# EAGLE board Prototype1 (EAGLE 6.1)
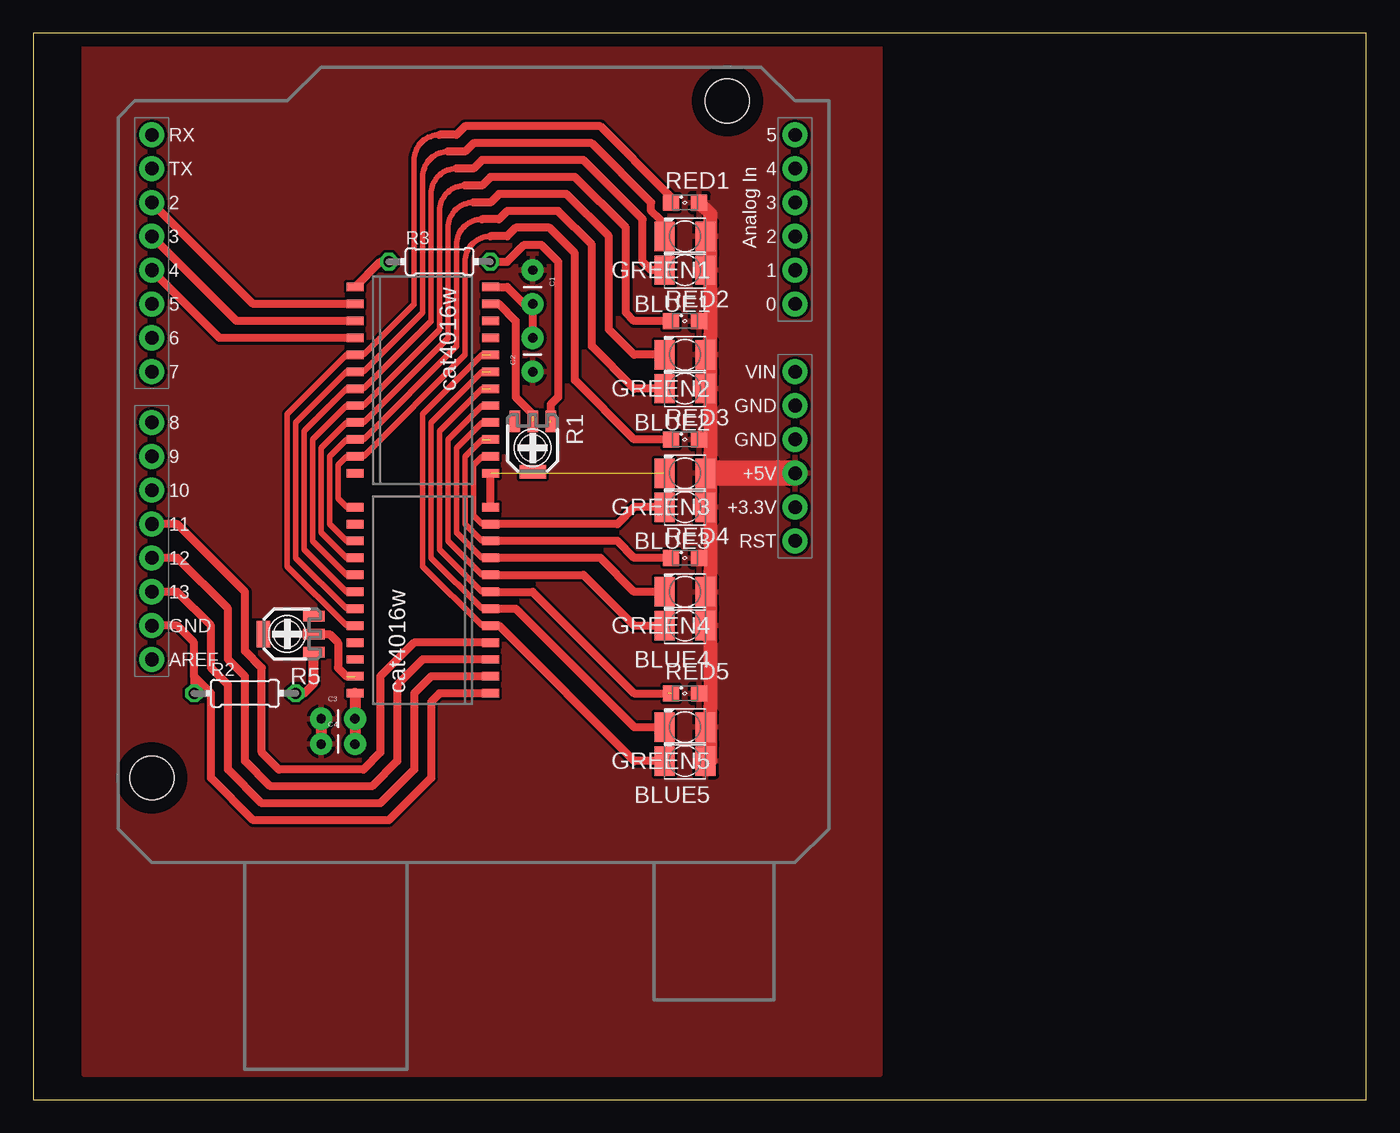
[diagram p0: board, top side]
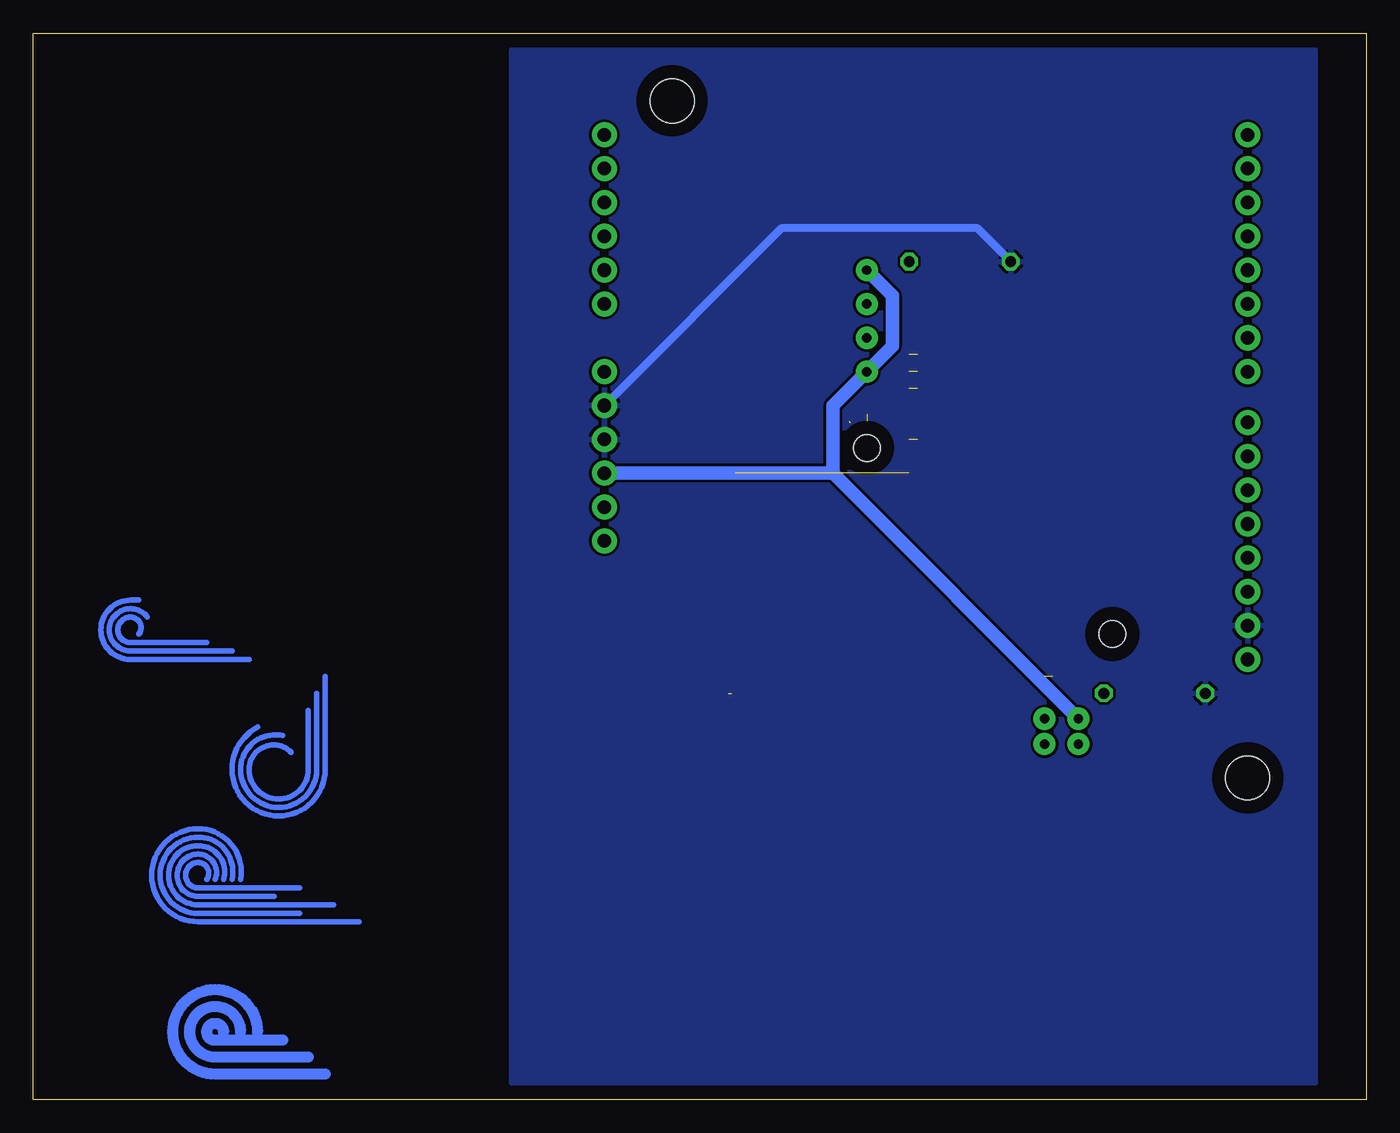
[diagram p1: board, bottom side, seen from below]

Size 100 x 80 mm. Coordinates in mm from the lower left corner, seen from the top.
Outline: 0,0 100,0 100,80 0,80 0,0
Copper layers (1*16): Top 0.035mm / dielectric 1.5mm / Bottom 0.035mm
Design rules: minimum track width 10mil, minimum drill 24mil, track to track 8mil, track to pad 8mil, pad to pad 8mil, via to via 8mil, smd to smd 8mil, copper to edge 40mil, drill to drill 8mil, minimum pad ring 10mil, minimum via ring 8mil, stop-mask expansion 4mil, vias tented up to drill 0mil, thermal gap 10mil

## Footprints (pad centres in the part's own frame; a part is rotated, then mirrored left to right if it is on the bottom)
KA-3528ASYC = smd 1.5 x 2.2: A -1.55,0; C 1.55,0
CAP-PTH-SMALL = drill 0.7 pad 1.651: 1 0,0; 2 2.54,0
RTRIM3165W = smd 0.8 x 1.6: 1 -1.35,-2; 2 0,-2; 3 1.35,-2 | smd 2 x 1: 4 0,1.8 | hole 2: 0,0
0204/7 = drill 0.813 octagon: 1 -3.81,0; 2 3.81,0
SML0805 = smd 1.2 x 1.2: A 1.05,0; C -1.05,0
DUEMILANOVE_SHIELD = drill 1.016 pad 1.88: 3.3V 50.8,26.67; 5V 50.8,29.21; A0 50.8,41.91; A1 50.8,44.45; A2 50.8,46.99; A3 50.8,49.53; A4 50.8,52.07; A5 50.8,54.61; AREF 2.54,15.24; D2 2.54,49.53; D3 2.54,46.99; D4 2.54,44.45; D5 2.54,41.91; D6 2.54,39.37; D7 2.54,36.83; D8 2.54,33.02; D9 2.54,30.48; D10 2.54,27.94; D11 2.54,25.4; D12 2.54,22.86; D13 2.54,20.32; GND@0 50.8,31.75; GND@1 50.8,34.29; GND@2 2.54,17.78; RES 50.8,24.13; RX 2.54,54.61; TX 2.54,52.07; VIN 50.8,36.83 | hole 3.302: 45.72,57.15; 2.54,6.35
SOIC24W = smd 0.635 x 1.27: 1 -6.985,-5.08; 2 -5.715,-5.08; 3 -4.445,-5.08; 4 -3.175,-5.08; 5 -1.905,-5.08; 6 -0.635,-5.08; 7 0.635,-5.08; 8 1.905,-5.08; 9 3.175,-5.08; 10 4.445,-5.08; 11 5.715,-5.08; 12 6.985,-5.08; 13 6.985,5.08; 14 5.715,5.08; 15 4.445,5.08; 16 3.175,5.08; 17 1.905,5.08; 18 0.635,5.08; 19 -0.635,5.08; 20 -1.905,5.08; 21 -3.175,5.08; 22 -4.445,5.08; 23 -5.715,5.08; 24 -6.985,5.08

## Placement (x,y rotation side)
BLUE1  [KA-3528ASYC]  48.9,62.23 180 top
BLUE2  [KA-3528ASYC]  48.9,53.34 180 top
BLUE3  [KA-3528ASYC]  48.9,44.45 180 top
BLUE4  [KA-3528ASYC]  48.9,35.56 180 top
BLUE5  [KA-3528ASYC]  48.9,25.4 180 top
C1  500nF  [CAP-PTH-SMALL]  37.47,62.23 270 top
C2  500nF  [CAP-PTH-SMALL]  37.47,54.61 90 top
C3  500nF  [CAP-PTH-SMALL]  21.59,28.57 0 top
C4  500nF  [CAP-PTH-SMALL]  21.59,26.67 0 top
GREEN1  [KA-3528ASYC]  48.9,64.77 180 top
GREEN2  [KA-3528ASYC]  48.9,55.88 180 top
GREEN3  [KA-3528ASYC]  48.9,46.99 180 top
GREEN4  [KA-3528ASYC]  48.9,38.1 180 top
GREEN5  [KA-3528ASYC]  48.9,27.94 180 top
R1  [RTRIM3165W]  37.47,48.9 180 top
R2  [0204/7]  15.88,30.48 0 top
R3  [0204/7]  30.48,62.87 0 top
R5  [RTRIM3165W]  19.05,34.92 90 top
RED1  [SML0805]  48.9,67.31 0 top
RED2  [SML0805]  48.9,58.42 0 top
RED3  [SML0805]  48.9,49.53 0 top
RED4  [SML0805]  48.9,40.64 0 top
RED5  [SML0805]  48.9,30.48 0 top
U1  ARDUINO_SHIELDLABEL  [DUEMILANOVE_SHIELD]  6.35,17.78 0 top
U$2  CAT4016  [SOIC24W]  29.21,53.98 270 top
U$3  CAT4016  [SOIC24W]  29.21,37.47 90 top

## Library data of the parts
BLUE1-BLUE5 GREEN1-GREEN5 RED1-RED5 = led
C1-C4 U1 = SparkFun
R1-R3 R5 = rcl
U$2 U$3 = CAT4016

## Nets
+5V: BLUE1.A BLUE2.A BLUE3.A BLUE4.A BLUE5.A C1.1 C2.1 C3.1 C4.1 GREEN1.A GREEN2.A GREEN3.A GREEN4.A GREEN5.A RED1.A RED2.A RED3.A RED4.A RED5.A U1.5V
GND: R2.1 R3.1 U1.GND@0 U1.GND@1 U1.GND@2 U$2.1 U$3.1
N$1: C1.2 C2.2 U$2.24
N$2: R1.1 R3.2
N$3: R2.2 R5.1
N$4: R1.2 U$2.23
N$5: R5.2 U$3.23
N$6: C3.2 C4.2 U$3.24
N$7: U1.D3 U$2.3
N$8: U1.D4 U$2.4
N$9: U1.D13 U$3.2
N$10: U1.D2 U$2.2
N$11: GREEN2.C U$2.9 U$3.16
N$12: RED2.C U$2.8 U$3.17
N$13: BLUE1.C U$2.7 U$3.18
N$14: GREEN1.C U$2.6 U$3.19
N$15: BLUE2.C U$2.10 U$3.15
N$16: RED1.C U$2.5 U$3.20
N$17: RED3.C U$2.11 U$3.13
N$18: GREEN3.C U$2.13 U$3.12
N$19: BLUE3.C U$2.14 U$3.11
N$20: RED4.C U$2.15 U$3.10
N$21: GREEN4.C U$2.16 U$3.9
N$22: BLUE4.C U$2.17 U$3.8
N$23: RED5.C U$2.18 U$3.7
N$24: GREEN5.C U$2.19 U$3.6
N$25: U1.D12 U$3.3
N$31: U1.D11 U$3.4
N$39: BLUE5.C U$2.20 U$3.5

## Tracks (layer width: path | path; a pad name or v marks a point on that pad's centre or on a via)
+5V
  Top 0.61: 50.8,27.94 GREEN5.A 50.16,27.94
  Top 0.813: C3.1 C4.1
  Top 1.016: RED1.A 50.8,66.45 50.8,46.99 50.8,25.4
  Top 1.93: U1.5V 50.8,46.99
  Bottom 1.016: C1.1 35.56,60.33 35.56,56.52 C2.1 40.01,52.07 40.01,46.99 | C3.1 40.01,46.99 | 40.01,46.99 U1.5V
  pour Top: 3.81,1.91 63.5,1.91 63.5,79.38 3.81,79.38
GND
  Top 0.61: U$3.1 30.48,30.48 29.84,29.84 29.84,24.13 26.67,20.95 16.51,20.95 13.34,24.13 13.34,30.48 12.06,31.75 | 12.06,31.75 12.06,34.29 10.79,35.56 U1.GND@2 | 12.06,31.75 R2.1 | U$2.1 26.04,62.87 R3.1
  Bottom 0.61: U1.GND@1 43.81,65.41 29.21,65.41 R3.1
  pour Bottom: 3.81,78.74 64.14,78.74 64.14,1.27 3.81,1.27
N$1
  Top 0.61: C2.2 C1.2 36.83,59.69 35.56,60.96 U$2.24
N$2  (1 unrouted)
  Top 0.61: 38.73,51.44 38.73,50.8 | R3.2 35.56,62.87 36.83,64.14 38.1,64.14 39.37,62.87 39.37,52.7 38.81,52.15 R1.1
N$3
  Top 0.61: R2.2 20.32,30.48 20.95,31.11 | 20.95,31.11 20.95,33.66 | R5.1 21.05,31.21 20.95,31.11
N$4  (1 unrouted)
  Top 0.61: U$2.23 34.92,59.69 36.2,58.42 36.2,52.7 37.47,51.44
N$5  (1 unrouted)
  Top 0.61: R5.2 22.23,34.92 22.86,34.29 22.86,32.38 23.5,31.75
N$6
  Top 0.813: U$3.24 C3.2 C4.2
N$7
  Top 0.61: U$2.3 15.24,58.42 U1.D3
N$8
  Top 0.61: U$2.4 13.97,57.15 U1.D4
N$9
  Top 0.61: U$3.2 29.84,31.75 28.57,30.48 28.57,24.77 26.04,22.23 17.14,22.23 14.61,24.77 14.61,31.11 13.34,32.38 13.34,35.56 10.79,38.1 U1.D13
N$10
  Top 0.61: U$2.2 16.51,59.69 U1.D2
N$11
  Top 0.406: U$3.16 23.5,40.64 21.59,42.55 21.59,48.9 23.5,50.8 U$2.9 24.77,50.8 31.11,57.15 31.11,65.41 arc-90 33.02,67.31
  Top 0.61: GREEN2.C 45.09,55.88 43.18,57.78 43.18,64.77 40.01,67.94 34.92,67.94 34.29,67.31 33.02,67.31
N$12
  Top 0.406: U$3.17 23.5,39.37 20.95,41.91 20.95,49.53 23.5,52.07 U$2.8 24.77,52.07 30.48,57.78 30.48,66.67 arc-90 32.38,68.58
  Top 0.61: RED2.C 45.09,58.42 44.45,59.05 44.45,65.41 40.64,69.22 34.29,69.22 33.66,68.58 32.38,68.58
N$13
  Top 0.406: U$3.18 23.5,38.1 20.32,41.27 20.32,50.16 23.5,53.34 U$2.7 24.77,53.34 29.84,58.42 29.84,67.94 arc-90 31.75,69.85
  Top 0.61: BLUE1.C 46.35,62.23 45.72,62.87 45.72,66.04 41.27,70.48 33.66,70.48 33.02,69.85 31.75,69.85
N$14
  Top 0.406: U$3.19 23.5,36.83 19.68,40.64 19.68,50.8 23.5,54.61 U$2.6 24.77,54.61 29.21,59.05 29.21,69.22 arc-90 31.11,71.12 | 46.99,66.04 46.99,64.77
  Top 0.61: GREEN1.C 47.34,65.69 46.99,66.04 46.35,66.67 46.35,67.31 41.91,71.75 33.02,71.75 32.38,71.12 31.11,71.12
N$15
  Top 0.406: U$3.15 23.5,41.91 22.23,43.18 22.23,48.26 23.5,49.53 U$2.10 24.77,49.53 31.75,56.52 31.75,64.14 arc-90 33.66,66.04
  Top 0.61: BLUE2.C 45.09,53.34 41.91,56.52 41.91,64.14 39.37,66.67 35.56,66.67 34.92,66.04 33.66,66.04
N$16
  Top 0.406: U$3.20 23.5,35.56 19.05,40.01 19.05,51.44 23.5,55.88 U$2.5 24.77,55.88 28.57,59.69 28.57,70.48 arc-90 30.48,72.39 | 47.62,67.94 47.62,67.31
  Top 0.61: RED1.C 47.84,67.72 47.62,67.94 42.55,73.03 32.38,73.03 31.75,72.39 30.48,72.39
N$17
  Top 0.406: U$3.13 23.5,44.45 22.86,45.09 22.86,47.62 23.5,48.26 U$2.11 24.77,48.26 32.38,55.88 32.38,62.87 arc-90 34.29,64.77
  Top 0.61: RED3.C 45.09,49.53 40.64,53.98 40.64,63.5 38.73,65.41 36.2,65.41 35.56,64.77 34.29,64.77
N$18  (1 unrouted)
  Top 0.61: U$3.12 U$2.13
N$19
  Top 0.305: 33.66,43.18 U$3.11
  Top 0.406: 33.66,43.18 33.02,43.81 33.02,47.62 33.66,48.26 U$2.14
  Top 0.61: BLUE3.C 45.09,44.45 43.81,43.18 U$3.11
N$20  (1 unrouted)
  Top 0.406: U$3.10 33.66,41.91 32.38,43.18 32.38,48.26 33.66,49.53
  Top 0.61: RED4.C 45.09,40.64 43.81,41.91 U$3.10
N$21
  Top 0.406: U$2.16 33.66,50.8 31.75,48.9 31.75,42.55 33.66,40.64 U$3.9
  Top 0.61: GREEN4.C 45.09,38.1 42.55,40.64 U$3.9
N$22
  Top 0.406: U$3.8 33.66,39.37 31.11,41.91 31.11,49.53 33.66,52.07 U$2.17
  Top 0.61: U$3.8 41.27,39.37 45.09,35.56 BLUE4.C
N$23  (2 unrouted)
  Top 0.305: U$3.7 33.66,38.1
  Top 0.406: 33.66,38.1 30.48,41.27 30.48,50.16 33.66,53.34
  Top 0.61: U$3.7 37.47,38.1 45.09,30.48 47.62,30.48
N$24  (1 unrouted)
  Top 0.305: 33.66,36.83 U$3.6
  Top 0.406: 33.66,54.61 29.84,50.8 29.84,40.64 33.66,36.83
  Top 0.61: U$3.6 36.2,36.83 45.09,27.94 GREEN5.C
N$25
  Top 0.61: U$3.3 29.21,33.02 27.3,31.11 27.3,25.4 25.4,23.5 17.78,23.5 15.88,25.4 15.88,31.75 14.61,33.02 14.61,36.83 10.79,40.64 U1.D12
N$29
  Top 0.406: 23.5,38.1 20.32,41.27 20.32,50.16 23.5,53.34
N$30
  Top 0.406: 23.5,54.61 19.68,50.8 19.68,40.64 23.5,36.83
N$31
  Top 0.61: U$3.4 28.57,34.29 26.04,31.75 26.04,26.04 24.77,24.77 18.41,24.77 17.14,26.04 17.14,32.38 15.88,33.66 15.88,38.1 10.79,43.18 U1.D11
N$32
  Bottom 0.406: 79.38,29.21 79.38,24.77 arc180 83.82,24.77 arc136 80.64,26.04
N$33
  Bottom 0.406: 78.74,30.48 78.74,24.77 arc180 84.45,24.77 arc103 81.28,27.3
N$34
  Bottom 0.406: 78.11,31.75 78.11,24.77 arc180 85.09,24.77 arc62 83.19,27.94
N$35
  Bottom 0.406: 80.01,15.88 87.63,15.88 arc180 87.63,17.78 arc127 87,16.51
N$38
  Bottom 0.406: 81.92,15.24 87.63,15.24 arc180 87.63,18.41 arc113 86.36,16.51
N$39  (1 unrouted)
  Top 0.305: U$3.5 33.66,35.56
  Top 0.406: 33.66,35.56 29.21,40.01 29.21,51.44 33.66,55.88
  Top 0.61: BLUE5.C 45.09,25.4 34.92,35.56 U$3.5
N$40
  Bottom 0.406: 77.47,14.61 87.63,14.61 arc180 87.63,19.05 arc106 85.72,16.51
N$41
  Bottom 0.406: 80.01,13.97 87.63,13.97 arc180 87.63,19.68 arc103 85.09,16.51
N$42
  Bottom 0.406: 75.56,13.34 87.63,13.34 arc180 87.63,20.32 arc100 84.45,16.51
N$43
  Bottom 0.813: 81.28,4.45 86.36,4.45 arc180 86.36,5.71 arc90 85.72,5.08
N$44
  Bottom 0.813: 79.38,3.17 86.36,3.17 arc180 86.36,6.99 arc90 84.45,5.08
N$45
  Bottom 0.813: 78.11,1.91 86.36,1.91 arc180 86.36,8.26 arc90 83.19,5.08
N$46
  Bottom 0.406: 87,34.29 92.71,34.29 arc180 92.71,36.2 arc127 92.08,34.92
N$47
  Bottom 0.406: 85.09,33.66 92.71,33.66 arc180 92.71,36.83 arc53 91.44,36.2
N$48
  Bottom 0.406: 83.82,33.02 92.71,33.02 arc180 92.71,37.47 92.08,37.47